# Altium PCB PCB1.PcbDoc
Units mm, origin at the board's own origin, x right, y up, seen from the top; angles counter-clockwise.
Board outline 78.87 x 74.3 mm, 2 copper layers (Top Layer, Bottom Layer); 25 components, 17 nets, 59 pads, 3 vias.
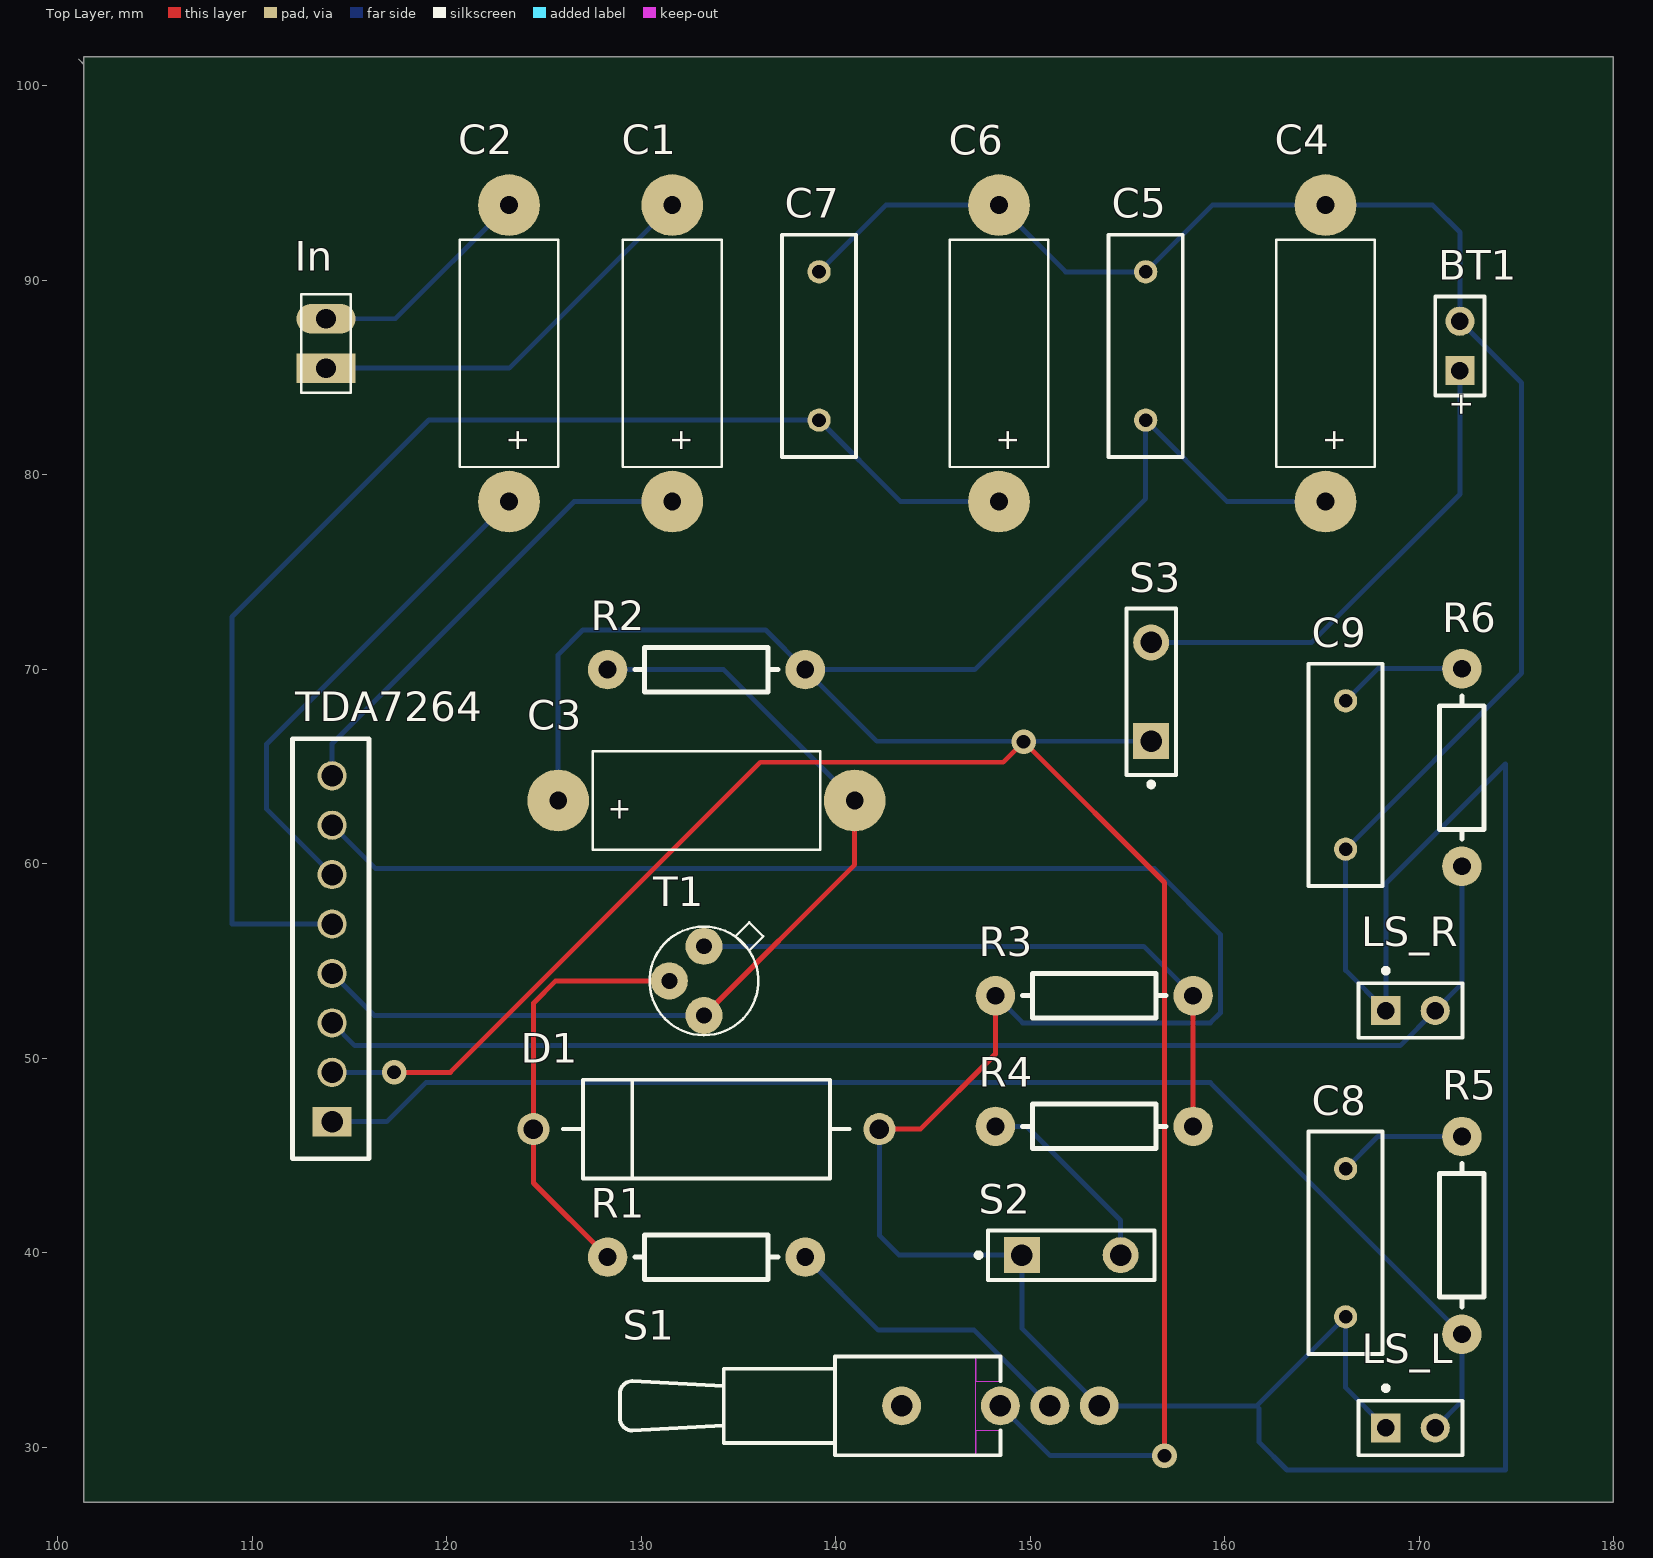
[diagram p0: Top Layer view]
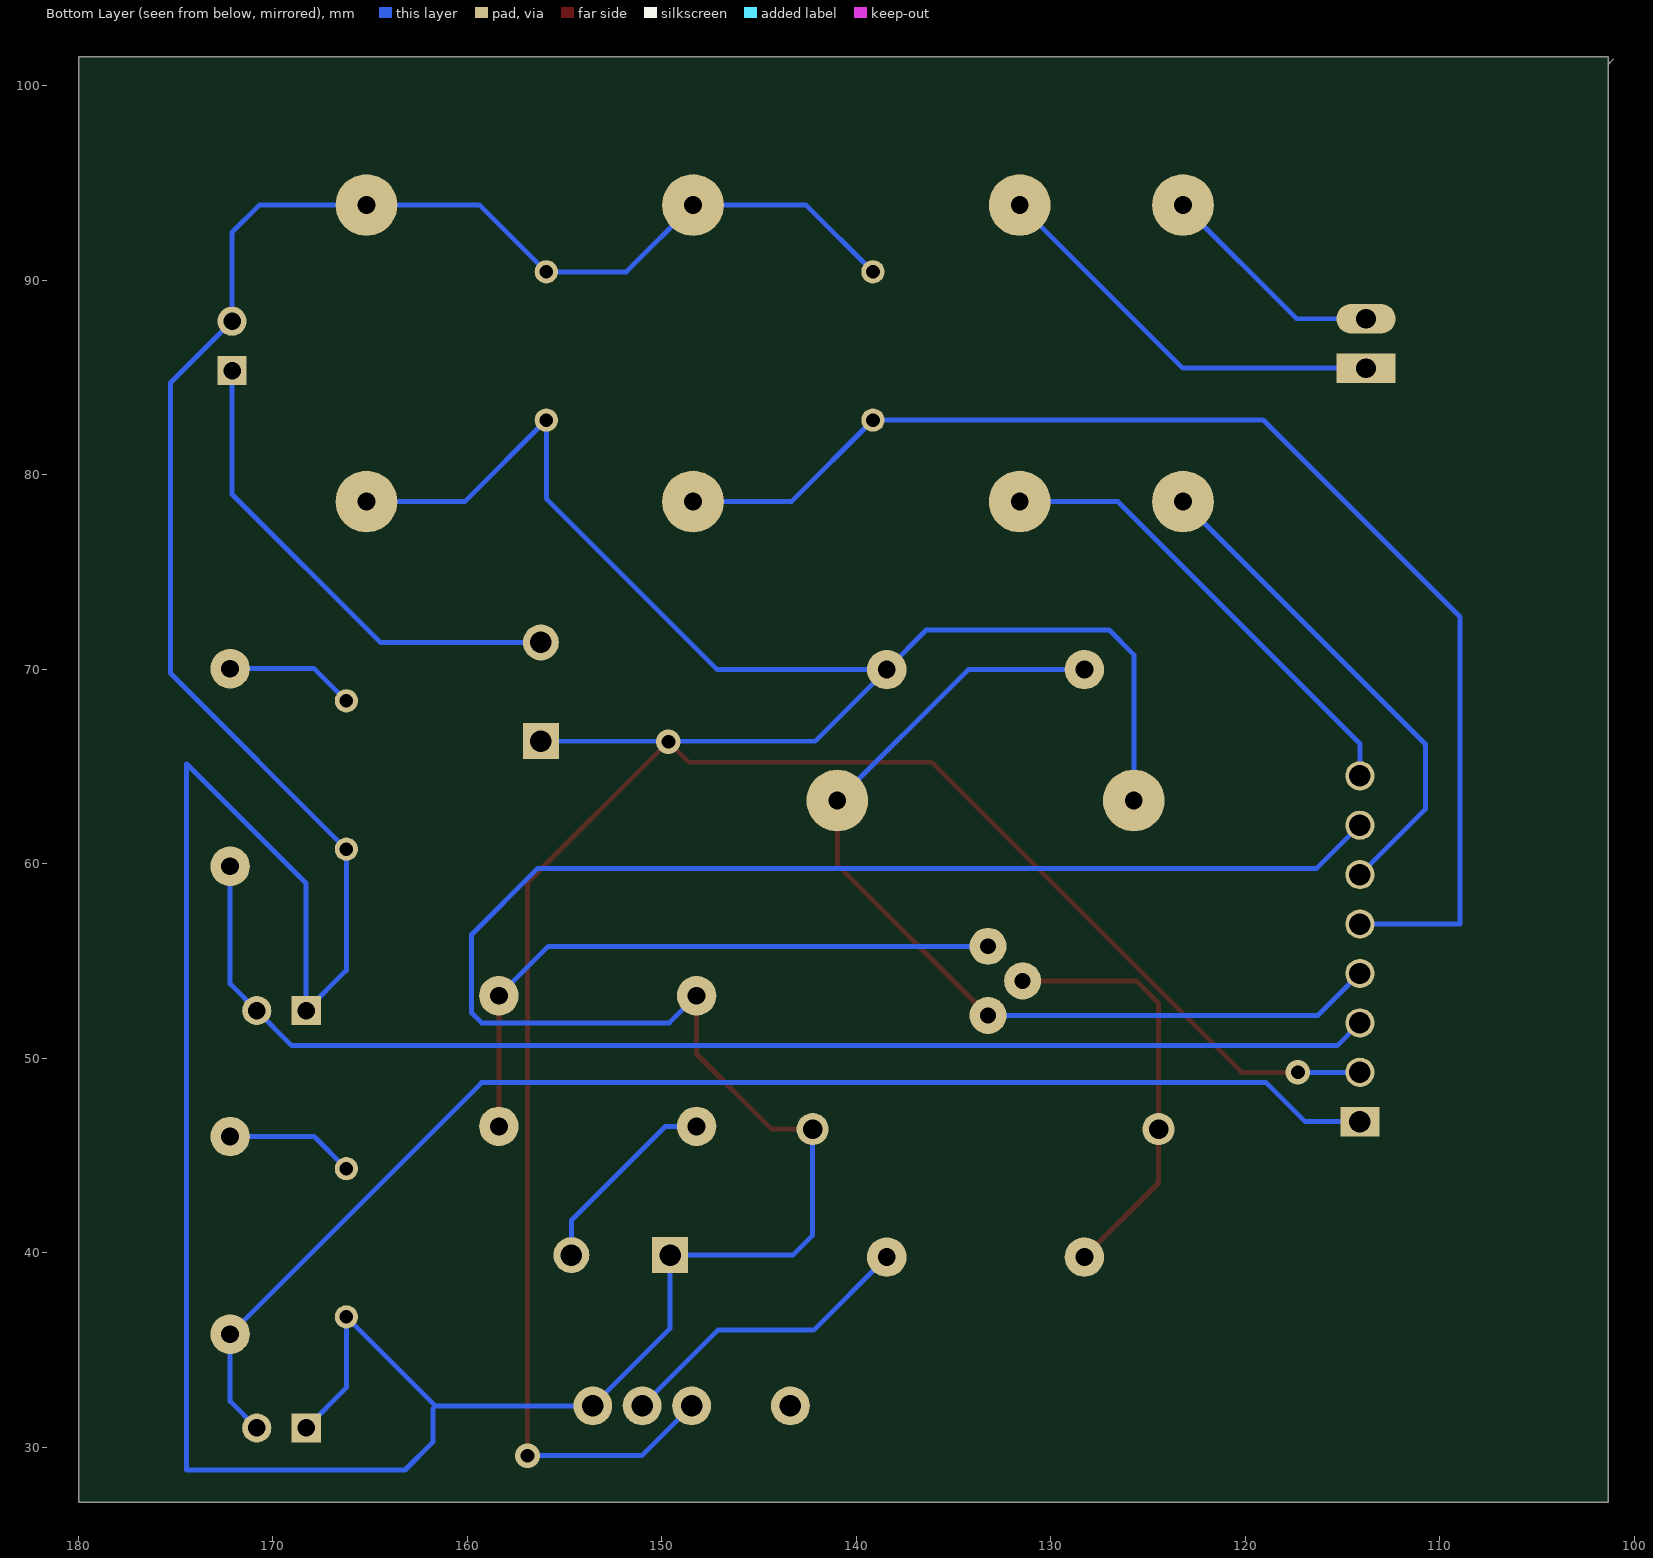
[diagram p1: Bottom Layer view, seen from below]

## Layer stack, top to bottom
Top Layer: signal copper 0.0356
Dielectric: dielectric 0.32, FR-4, Dk 4.8
Bottom Layer: signal copper 0.0356

## Board outline
101.346,101.473 179.959,101.473 179.959,27.178 101.346,27.178 101.346,101.092 101.092,101.346 101.346,101.092 101.346,100.711

## Design rules (kind name [scope] priority, off if disabled: settings)
Clearance [All] p1: gap=0.254
PolygonConnect [All] p1: connectstyle=Relief reliefconductorwidth=0.254 reliefentries=4 polygonreliefangle="90 Angle" airgapwidth=0.254
RoutingVias [All] p1: holewidth=0.711 width=1.27 viastyle="Through Hole" minholewidth=0.711 minwidth=1.27 maxholewidth=0.711 maxwidth=1.27
SolderMaskExpansion [All] p1: expansion=0.102
Width [All] p1: maxlimit=0.254 minlimit=0.254 preferedwidth=0.254
28 further rules are at their usual default settings.

## Components (designator, comment, footprint, x,y, rotation, side; value= is the part's Value field where it differs from the comment)
BT1 "Battery" BAT-2 172.085,86.614 r90 top
C1 "Cap" "cap 48 pol (.46/.2/.6/125/36)" 131.598,86.233 r90 top
C2 "Cap" "cap 48 pol (.46/.2/.6/125/36)" 123.203,86.233 r90 top
C3 "Cap" "cap 48 pol (.46/.2/.6/125/36)" 133.35,63.246 r0 top
C4 "Cap" "cap 48 pol (.46/.2/.6/125/36)" 165.178,86.233 r90 top
C5 "100nF" RAD-0.3 155.93,86.614 r270 top
C6 "Cap" "cap 48 pol (.46/.2/.6/125/36)" 148.388,86.233 r90 top
C7 "Cap" RAD-0.3 139.14,86.614 r270 top
C8 "Cap" RAD-0.3 166.207,40.511 r90 top
C9 "Cap" RAD-0.3 166.207,64.56 r90 top
D1 "D Zener" DIODE-0.7 133.35,46.355 r180 top
In "Input" "hdr 1x2" 113.792,85.471 r90 top
LS_L "Speaker" PIN2 168.275,30.991 r0 top
LS_R "Speaker" PIN2 168.275,52.451 r0 top
R1 "Res" "ws 0.6W H" 133.35,39.778 r0 top
R2 "Res" "ws 0.6W H" 133.35,69.977 r0 top
R3 "Res" "ws 0.6W H" 153.289,53.213 r0 top
R4 "Res" "ws 0.6W H" 153.289,46.496 r0 top
R5 "Res" "ws 0.6W H" 172.185,40.894 r270 top
R6 "Res" "ws 0.6W H" 172.185,64.943 r270 top
S1 "SW-SPDT" TL36WW15050 148.463,32.131 r180 top
S2 "SW-PB" SPST-2 152.102,39.878 r0 top
S3 "SW-SPST" SPST-2 156.21,68.834 r90 top
T1 "BC107" TO-18 133.223,53.975 r0 top
TDA7264 "TDA7264 stereo audio amplifier" MultiWatt8 114.109,46.736 r90 top

## Footprints (in the part's own frame and the unit in brackets; to place one, negate y for a bottom-side part, rotate by r counter-clockwise, add the part's x,y. Pads: shape width x height; smd on the part's side, far side on the other; paste and mask are expansions set on the pad)
BAT-2 [mm] "Battery; 2 Leads"
  rect 1.5x1.5 hole 0.9: 1(-1.27,0)
  round 1.5 hole 0.9: 2(1.27,0)
  silkscreen extent -2.54,-1.27 2.54,1.27
"cap 48 pol (.46/.2/.6/125/36)" [mil]
  round 125 / inner round 60 / far side round 125 hole 36 paste+0 mask+0: 1(-300,0) 2(300,0)
  silkscreen extent -230,-100 230,100
DIODE-0.7 [mm] "Diode, Thru-Hole; 2 Leads; 0.7 in Pin Spacing"
  round 1.65 hole 1: 1(-8.89,0) 2(8.89,0)
  silkscreen extent -7.37,-2.54 7.37,2.54
"hdr 1x2" [mil]
  rect 60x120 / inner round 60 / far side rect 60x120 hole 40 paste+0 mask+0: 1(0,0)
  oval 60x120 / inner round 60 / far side oval 60x120 hole 40 paste+0 mask+0: 2(100,0)
  silkscreen extent -50,-50 150,50
MultiWatt8 [mm]
  rect 1.5x2 hole 1.1: 1(0,0)
  round 1.5 hole 1.1: 2(2.54,0) 3(5.08,0) 4(7.62,0) 5(10.16,0) 6(12.7,0) 7(15.24,0) 8(17.78,0)
  silkscreen extent -1.91,-1.91 19.68,2.03
PIN2 [mm] "Photosensitive Diode; 2 Leads"
  rect 1.5x1.5 hole 0.9: 1(0,0)
  round 1.5 hole 0.9: 2(2.54,0)
  silkscreen extent -1.4,-1.4 3.94,2.17
RAD-0.3 [mm] "Radial Cap, Thru-Hole; 2 Leads; 0.3 in Pin Spacing"
  round 1.2 hole 0.7: 1(-3.81,0) 2(3.81,0)
  silkscreen extent -5.71,-1.9 5.71,1.91
SPST-2 [mm] "Switch; 2 Leads"
  rect 1.85x1.85 hole 1.1: 1(-2.54,0)
  round 1.85 hole 1.1: 2(2.54,0)
  silkscreen extent -4.89,-1.27 4.28,1.27
TL36WW15050 [mm] "Switch; 4 Leads"
  round 2 hole 1.1: 1(0,0) 2(-2.54,0) 3(-5.08,0) M(5.08,0)
  Top Layer keep-out region: 0,-1.27 0,-2.54 1.27,-2.54 1.27,-1.27
  Top Layer keep-out region: 0,2.54 0,1.27 1.27,1.27 1.27,2.54
  Top Layer keep-out region: 1.27,2.54 1.27,-2.54 8.509,-2.54 8.509,2.54
  silkscreen extent 0,-2.54 19.56,2.54
TO-18 [mil]
  round 75 / inner round 60 / far side round 75 hole 32 paste+0 mask+0: 1(0,70) 2(-70,0) 3(0,-70)
  silkscreen extent -110,-110 120,118
"ws 0.6W H" [mil]
  round 80 hole 36: 1(-200,0) 2(200,0)
  silkscreen extent -145,-45 145,45

## Part data
BT1: "Multicell Battery"
C1 C2 C3 C4 C6: library part CECA0.47uF/63V, "elektrolytische condensator axiaal 0.47uF/63V"
C5: library part Cap, "Capacitor"
C7 C8 C9: "Capacitor"
D1: "Zener Diode"
In: library part "CON HDR 1x2", "pcb header recht 1x2  pitch 100mil"
LS_L LS_R: "Loudspeaker"
R1 R2 R3 R4 R5 R6: library part 0R2, "weerstand 0R2 0.6W"
S1: "SPDT Subminiature Toggle Switch, Right Angle Mounting, Vertical Actuation"
S2: "Switch"
S3: "Single-Pole, Single-Throw Switch"
T1: "NPN transistor"
TDA7264: "25 W + 25 W stereo amplifier with mute and standby"

## Via types
v1: diameter 1.27, hole 0.711, Top Layer to Bottom Layer, 3 vias

## Nets (pads, with @x,y where several pads share a name; then routed paths per layer and width w, separated by ;. In a path a pad name is that pad's centre, name@x,y a point inside that pad or via, vN(x,y) a via of type N, cw(c..) or ccw(c..) an arc to the next point about the centre after c; other vN are vias at no path point)
GND: BT1.2 C4.2 C5.1 C6.2 C7.1 C8.1 C9.1 D1.1 LS_L.1 LS_R.1 R3.1 S1.3 S2.1 TDA7264.7 | length 268.9
  Top Layer w0.254: D1.1 144.348,46.355 148.209,50.216 R3.1
  Bottom Layer w0.254: TDA7264.7 116.345,59.741 156.388,59.741 159.766,56.363 159.766,52.324 159.258,51.816 149.606,51.816 R3.1 ; C7.1 142.569,93.853 C6.2 151.817,90.424 C5.1 159.359,93.853 C4.2 170.688,93.853 172.085,92.456 BT1.2 175.26,84.709 175.26,69.804 C9.1 166.207,54.519 LS_R.1 168.275,58.979 174.422,65.126 174.422,28.829 163.195,28.829 161.763,30.261 161.763,32.004 ; D1.1 142.24,40.894 143.256,39.878 S2.1 149.562,36.112 S1.3 161.636,32.131 C8.1 166.207,33.059 LS_L.1
NetBT1_1: BT1.1 S3.2 | length 25.4
  Bottom Layer w0.254: S3.2 164.465,71.374 172.085,78.994 BT1.1
NetC1_1: C1.1 TDA7264.8 | length 24.3
  Bottom Layer w0.254: TDA7264.8 114.109,66.18 126.543,78.613 C1.1
NetC1_2: C1.2 In.1 | length 21.3
  Bottom Layer w0.254: In.1 123.216,85.471 C1.2
NetC2_1: C2.1 TDA7264.6 | length 25.7
  Bottom Layer w0.254: TDA7264.6 110.744,62.801 110.744,66.154 C2.1
NetC2_2: C2.2 In.2 | length 11.8
  Bottom Layer w0.254: In.2 117.361,88.011 C2.2
NetC3_1: C3.1 C4.1 C5.2 R2.2 S1.1 S3.1 TDA7264.2 | length 169.4
  Top Layer w0.254: v1(117.297,49.276) 120.186,49.276 136.124,65.215 148.603,65.215 v1(149.657,66.269) 156.896,59.03 v1(156.896,29.566) ; S1.1 S1.1@148.844,32.512
  Bottom Layer w0.254: TDA7264.2 v1(117.297,49.276) ; C3.1 125.73,70.739 127,72.009 136.398,72.009 R2.2 ; S1.1 151.028,29.566 v1(156.896,29.566) ; S3.1 142.113,66.294 R2.2 ; C4.1 160.121,78.613 C5.2 155.93,78.765 147.142,69.977 R2.2
NetC3_2: C3.2 R2.1 T1.3 TDA7264.4 | length 49.8
  Top Layer w0.254: T1.3 140.97,59.944 C3.2
  Bottom Layer w0.254: TDA7264.4 116.268,52.197 T1.3 ; R2.1 134.239,69.977 C3.2
NetC6_1: C6.1 C7.2 TDA7264.5 | length 66.3
  Bottom Layer w0.254: TDA7264.5 108.966,56.896 108.966,72.695 119.075,82.804 C7.2 143.331,78.613 C6.1
NetC8_2: C8.2 R5.1 | length 6.7
  Bottom Layer w0.254: C8.2 167.859,45.974 R5.1
NetC9_2: C9.2 R6.1 | length 6.7
  Bottom Layer w0.254: C9.2 167.859,70.023 R6.1
NetD1_2: D1.2 R1.1 T1.2 | length 22.1
  Top Layer w0.254: R1.1 124.46,43.588 D1.2 124.46,52.832 125.603,53.975 T1.2
NetLS_L_2: LS_L.2 R5.2 TDA7264.1 | length 69.7
  Bottom Layer w0.254: TDA7264.1 116.916,46.736 118.923,48.743 159.256,48.743 R5.2 172.185,32.361 LS_L.2
NetLS_R_2: LS_R.2 R6.2 TDA7264.3 | length 65.9
  Bottom Layer w0.254: TDA7264.3 115.278,50.648 169.012,50.648 LS_R.2 172.185,53.821 R6.2
NetR1_2: R1.2 S1.2 | length 15.7
  Bottom Layer w0.254: R1.2 142.191,36.017 147.117,36.017 S1.2
NetR3_2: R3.2 R4.2 T1.1 | length 32.9
  Top Layer w0.254: R4.2 R3.2
  Bottom Layer w0.254: T1.1 155.829,55.753 R3.2
NetR4_1: R4.1 S2.2 | length 10.2
  Bottom Layer w0.254: R4.1 149.803,46.496 154.642,41.656 S2.2
pads on no net: S1.M

## Text inside footprints (layer, text, board x,y; h text height)
BT1: Top Overlay "+" at 172.662,82.944 h1.15 r90
C1: Top Overlay "+" at 132.538,81.153 h1.07 r90
C2: Top Overlay "+" at 124.143,81.153 h1.07 r90
C3: Top Overlay "+" at 128.27,62.306 h1.07
C4: Top Overlay "+" at 166.117,81.153 h1.07 r90
C6: Top Overlay "+" at 149.328,81.153 h1.07 r90